# EAGLE board ioboard (EAGLE 4.13)
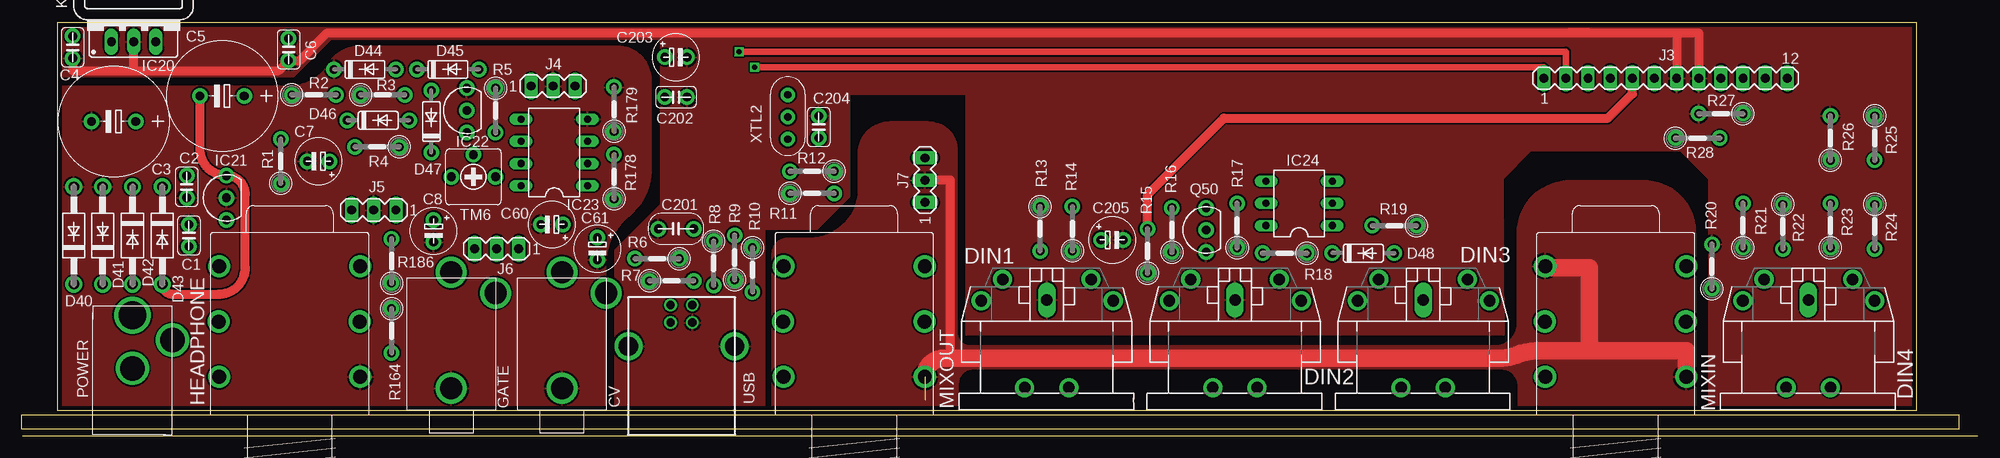
[diagram p0: board, top side]
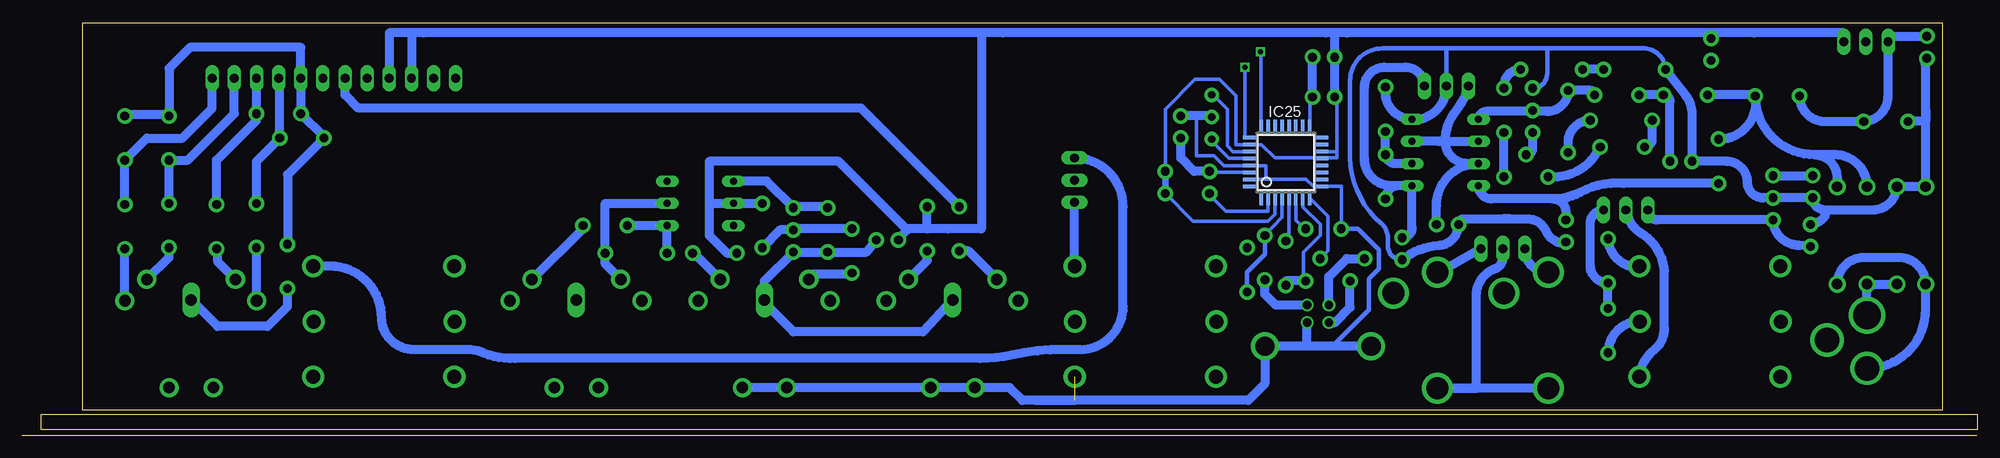
[diagram p1: board, bottom side, seen from below]

Size 224.41 x 47.37 mm. Coordinates in mm from the lower left corner, seen from the top.
Outline: 0.13,0 224.41,0
Outline: 4.06,2.92 217.42,2.92 217.42,47.37 4.06,47.37 4.06,2.92
Outline: 0,2.41 222.25,2.41 222.25,0.76 0,0.76 0,2.41
Copper layers (1*16): Top 0.035mm / dielectric 1.5mm / Bottom 0.035mm
Design rules "default": minimum track width 10mil, minimum drill 24mil, track to track 8mil, track to pad 8mil, pad to pad 8mil, via to via 8mil, smd to smd 8mil, copper to edge 20mil, drill to drill 8mil, minimum pad ring 10mil, minimum via ring 8mil, stop-mask expansion 4mil, vias tented up to drill 0mil, thermal gap 10mil

## Footprints (pad centres in the part's own frame; a part is rotated, then mirrored left to right if it is on the bottom)
C050H075X075 = drill 1 pad 1.778 round: 1 -1.27,0; 2 1.27,0
E5-13 = drill 1 pad 1.778 round: + -2.54,0; - 2.54,0
E5-6 = drill 1 pad 1.778 round: + -1.27,0; - 1.27,0
C050-025X075 = drill 1 pad 1.778 round: 1 -2.032,0; 2 2.032,0
CP-3502 = drill 2.54 round: SLEEVE 5.08,13.462; TIP 0,2.54; TIPSHUNT 0,15.85
DO41-10 = drill 1.2 pad 1.93 round: A 5.588,0; C -5.588,0
DO35-10 = drill 1 pad 1.778 round: A 3.556,0; C -3.556,0
CP-2350 = drill 1.321 pad 2.184 round: 1 7.62,12.58; 3 -7.52,12.58; 4 5.08,15.02; 5 -5.08,15.02; PE -2.54,2.62; PE@ 2.54,2.62 | drill 1.321 long: 2 0,12.68
REAN_1/4STERO = drill 1.6 pad 2.54 round: R 8.05,10.7; RN -8.15,10.7; S 8.1,4.35; SN -8.1,4.35; T 8.1,17.05; TN -8.1,17.05
78XXS = drill 1.016 long: GND 0,-2.54; IN -2.54,-2.54; OUT 2.54,-2.54
2SC536F = drill 1 pad 1.778 round: 1 2.54,0; 2 0,0; 3 -2.54,0
DIL08 = drill 0.813 long: 1 -3.81,-3.81; 2 -1.27,-3.81; 3 1.27,-3.81; 4 3.81,-3.81; 5 3.81,3.81; 6 1.27,3.81; 7 -1.27,3.81; 8 -3.81,3.81
DIL06 = drill 0.813 long: 1 -2.54,-3.81; 2 0,-3.81; 3 2.54,-3.81; 4 2.54,3.81; 5 0,3.81; 6 -2.54,3.81
SQFP-S-7X7-32 = smd 0.4 x 1.6: 1 -2.85,-4.1; 2 -2.05,-4.1; 3 -1.25,-4.1; 4 -0.45,-4.1; 5 0.35,-4.1; 6 1.15,-4.1; 7 1.95,-4.1; 8 2.75,-4.1; 17 2.75,4.1; 18 1.95,4.1; 19 1.15,4.1; 20 0.35,4.1; 21 -0.45,4.1; 22 -1.25,4.1; 23 -2.05,4.1; 24 -2.85,4.1 | smd 1.6 x 0.4: 9 4.1,-2.75; 10 4.1,-1.95; 11 4.1,-1.15; 12 4.1,-0.35; 13 4.1,0.45; 14 4.1,1.25; 15 4.1,2.05; 16 4.1,2.85; 25 -4.1,2.85; 26 -4.1,2.05; 27 -4.1,1.25; 28 -4.1,0.45; 29 -4.1,-0.35; 30 -4.1,-1.15; 31 -4.1,-1.95; 32 -4.1,-2.75
MA12-1 = drill 1.016 long: 1 -13.97,0; 2 -11.43,0; 3 -8.89,0; 4 -6.35,0; 5 -3.81,0; 6 -1.27,0; 7 1.27,0; 8 3.81,0; 9 6.35,0; 10 8.89,0; 11 11.43,0; 12 13.97,0
MA03-1 = drill 1.016 long: 1 -2.54,0; 2 0,0; 3 2.54,0
PJ-102A = drill 2.8 round: P$1 -4.6,-10.862; P$2 0,-7.62 | drill 3.2 round: P$3 0,-13.716
0207/5V = drill 1 pad 1.778 round: 1 -2.54,0; 2 2.54,0
306 = drill 1 pad 1.778 round: 1 -2.54,0; 2 0,-2.54; 3 2.54,0
PN61729 = drill 0.95 round: 1 1.25,14.87; 2 -1.25,14.87; 3 -1.25,12.87; 4 1.25,12.87 | drill 2.2 round: M2 -6.096,10.16; P$2 6.096,10.16
CERM_OSC = drill 0.813 pad 1.676 round: P$1 -2.54,0; P$2 0,0; P$3 2.54,0

## Placement (x,y rotation side)
C1  .1  [C050H075X075]  19.18,22.99 90 top
C2  .1  [C050H075X075]  18.92,28.57 270 top
C3  2200/16  [E5-13]  10.54,36.07 180 top
C4  .1  [C050H075X075]  5.84,44.58 270 top
C5  2200/16  [E5-13]  22.99,38.99 180 top
C6  .1  [C050H075X075]  30.61,44.32 270 top
C7  100/25  [E5-6]  34.04,31.5 180 top
C8  100/25  [E5-6]  47.24,23.5 270 top
C60  10/16  [E5-6]  60.83,24.26 180 top
C61  10/16  [E5-6]  66.04,21.46 270 top
C201  33nF  [C050-025X075]  75.06,23.75 180 top
C202  .1uF  [C050H075X075]  75.06,38.86 0 top
C203  10uF  [E5-6]  75.06,43.43 0 top
C204  .1uF  [C050H075X075]  91.44,35.43 90 top
C205  10uF  [E5-6]  125.09,22.48 0 top
CV  MONO_CC  [CP-3502]  61.98,2.92 0 top
D40  1N4001  [DO41-10]  5.97,22.99 90 top
D41  1N4001  [DO41-10]  9.27,22.99 90 top
D42  1N4001  [DO41-10]  12.7,22.99 270 top
D43  1N4001  [DO41-10]  16.13,22.99 270 top
D44  1N4148  [DO35-10]  39.37,42.04 0 top
D45  1N4148  [DO35-10]  48.9,42.04 0 top
D46  1N4148  [DO35-10]  40.89,36.2 0 top
D47  1N4148  [DO35-10]  46.99,36.07 90 top
D48  1N4148  [DO35-10]  153.92,20.95 0 top
DIN1  CP2350  [CP-2350]  117.6,2.92 0 top
DIN2  CP2350  [CP-2350]  139.19,2.92 0 top
DIN3  CP2350  [CP-2350]  160.78,2.92 0 top
DIN4  CP2350  [CP-2350]  204.98,2.92 0 top
GATE  MONO_CC  [CP-3502]  49.28,2.92 0 top
HEADPHONE  NEUTRIX_STEREO  [REAN_1/4STERO]  30.73,2.41 0 top
IC20  7805  [78XXS]  12.83,47.75 0 top
IC21  78L06Z  [2SC536F]  23.5,27.3 90 top
IC22  LM336Z-5.0  [2SC536F]  51.05,37.34 90 top
IC23  [DIL08]  61.09,32.51 90 top
IC24  4N37  [DIL06]  146.56,26.67 90 top
IC25  FT232  [SQFP-S-7X7-32]  79.38,31.37 0 bottom
J3  [MA12-1]  188.59,41.02 0 top
J4  [MA03-1]  60.96,40.13 0 top
J5  [MA03-1]  40.39,25.91 180 top
J6  [MA03-1]  54.48,21.46 180 top
J7  [MA03-1]  103.63,29.34 90 top
KK1  D03S  [D03S]  12.83,49.02 0 top
MIXIN  NEUTRIX_STEREO  [REAN_1/4STERO]  182.88,2.41 0 top
MIXOUT  NEUTRIX_STEREO  [REAN_1/4STERO]  95.5,2.41 0 top
POWER  2.1MMJACK  [PJ-102A]  12.7,0.13 180 top
Q50  2SC536F  [2SC536F]  135.89,23.62 90 top
R1  100  [0207/5V]  29.72,31.5 90 top
R2  1k  [0207/5V]  33.53,39.12 0 top
R3  6.8k  [0207/5V]  41.4,39.12 0 top
R4  5.6k  [0207/5V]  40.77,33.15 180 top
R5  2.4k  [0207/5V]  54.36,37.34 270 top
R6  27  [0207/5V]  72.9,20.32 180 top
R7  27  [0207/5V]  74.55,17.78 0 top
R8  1.5k  [0207/5V]  79.38,19.81 270 top
R9  4.7k  [0207/5V]  81.79,20.45 90 top
R10  10k  [0207/5V]  83.82,19.05 270 top
R11  10K  [0207/5V]  90.68,27.81 0 top
R12  470  [0207/5V]  90.68,30.35 180 top
R13  220  [0207/5V]  116.84,23.75 270 top
R14  220  [0207/5V]  120.52,23.75 90 top
R15  220  [0207/5V]  129.16,21.21 90 top
R16  100  [0207/5V]  131.95,23.62 90 top
R17  1k  [0207/5V]  139.45,24.13 90 top
R18  220  [0207/5V]  144.91,20.95 180 top
R19  220  [0207/5V]  157.48,24.13 180 top
R20  22  [0207/5V]  193.93,19.43 90 top
R21  2.2K  [0207/5V]  197.48,24.13 90 top
R22  2.2K  [0207/5V]  202.06,24 270 top
R23  2.2K  [0207/5V]  207.52,24.13 90 top
R24  2.2K  [0207/5V]  212.6,24 270 top
R25  100K  [0207/5V]  212.6,34.16 270 top
R26  100K  [0207/5V]  207.52,34.16 90 top
R27  100K  [0207/5V]  194.94,36.96 180 top
R28  100K  [0207/5V]  192.28,34.16 0 top
R164  10  [0207/5V]  42.42,12.06 270 top
R178  2.2k  [0207/5V]  67.94,29.72 90 top
R179  1.8k  [0207/5V]  67.94,37.46 90 top
R186  10  [0207/5V]  42.42,20.07 90 top
TM6  2k  [306]  51.82,29.72 180 top
USB  [PN61729]  75.69,0.13 0 top
XTL2  6.00MHz  [CERM_OSC]  87.88,36.58 90 top

## Library data of the parts
C1-C8 C60 C61 C201-C205 R1-R28 R164 R178 R179 R186 = rcl
CV DIN1-DIN4 GATE HEADPHONE IC21-IC23 MIXIN MIXOUT POWER Q50 TM6 USB = 303parts
D40-D48 = diode
IC20 = v-reg
IC24 = optocoupler
IC25 = usbtoys
J3-J7 = con-lstb
KK1 = heatsink
XTL2 = minimidi

## Nets
+5.333V: C60.+ IC23.3 IC23.6 IC23.7 J4.1
+5V: C6.1 C202.1 C203.+ C205.+ IC20.OUT IC24.5 IC25.3 IC25.13 IC25.14 IC25.26 J3.3 J3.4 R11.2 R12.1 R14.2 R17.2 R18.2
+6V: C1.1 IC21.3 J5.3
+12V: C61.+ IC23.1 J4.3 R178.1
DINSYNC1: J3.12 R24.1 R25.2
DINSYNC2: J3.11 R23.2 R26.1
DINSYNC3: J3.10 R22.1 R27.1
DINSYNC4: J3.9 R21.2 R28.2
GND: C1.2 C2.2 C3.- C4.2 C6.2 C7.- C8.- C60.- C61.- C201.2 C202.2 C203.- C204.2 C205.- CV.TIP D40.A D41.A D44.C DIN1.2 DIN1.PE DIN1.PE@ DIN2.2 DIN2.PE DIN2.PE@ GATE.TIP HEADPHONE.S IC20.GND IC21.2 IC22.1 IC23.4 IC25.9 IC25.17 IC25.29 IC25.31 J3.7 J3.8 J4.2 J5.2 J7.2 MIXIN.S MIXIN.TN MIXOUT.S Q50.3 R10.1 R16.1 R20.2 R25.1 R26.2 R27.2 R28.1 R179.2 USB.4 USB.M2 USB.P$2
HP_OUT: J5.1 R164.1 R186.1
MIDI_IN: J3.5 Q50.2 R15.2 R17.1
MIDI_OUT: J3.6 R13.1
N$1: J7.1 MIXOUT.T
N$2: J7.3 MIXIN.T
N$3: C8.+ IC23.8 R1.1
N$4: D47.A IC22.2 IC23.5 R3.2
N$5: IC23.2 R178.2 R179.1
N$6: C7.+ R2.2 R3.1
N$7: R4.1 TM6.3
N$8: R5.2 TM6.1
N$9: D46.A D47.C
N$10: D46.C R4.2
N$11: D45.A R5.1
N$12: D44.A D45.C
N$13: IC22.3 TM6.2
N$14: R9.1 USB.1
N$15: D41.C D42.A POWER.P$3
N$16: C5.+ D42.C D43.C R1.2 R2.1
N$17: C2.1 C3.+ C4.1 C5.- D40.C D43.A IC20.IN IC21.1 POWER.P$2
N$18: IC24.4 Q50.1 R16.2
N$19: IC25.27
N$20: IC25.28
N$21: IC25.4 R9.2 R10.2
N$22: DIN4.3 R21.1
N$23: DIN4.5 R22.2
N$24: DIN4.1 R24.2
N$25: DIN4.4 R23.1
N$26: GATE.TIPSHUNT J6.3
N$27: CV.TIPSHUNT J6.1
N$28: HEADPHONE.R R164.2
N$29: HEADPHONE.T R186.2
N$78: DIN4.2 R20.1
N$87: D48.A DIN3.5 IC24.2
N$90: D48.C IC24.1 R19.2
N$234: DIN3.4 R19.1
N$293: DIN2.5 R15.1
N$294: DIN2.4 R18.1
N$295: DIN1.5 R13.2
N$296: DIN1.4 R14.1
N$307: R6.2 USB.2
N$309: R7.1 USB.3
N$310: IC25.7 R7.2 R8.2
N$311: IC25.8 R6.1
N$312: IC25.5 R8.1
N$313: C201.1 IC25.6
N$314: C204.1 IC25.30 R12.2
N$315: IC25.2 R11.1
USB_RX: IC25.24 J3.2
USB_TX: IC25.25 J3.1

## Tracks (layer width: path | path; a pad name or v marks a point on that pad's centre or on a via)
+5.333V
  Bottom 1.016: 61.09,33.78 arc-90 58.55,31.24 IC23.7 arc-90 62.1,26.42 C60.+ | 61.09,33.78 arc39 59.82,37.34 arc-25 J4.1 | 61.09,33.78 61.85,33.78 | 61.85,33.78 IC23.3 | 61.85,33.78 IC23.6
+5V
  Bottom 0.381: 74.8,46.23 74.8,46.35 73.41,46.35 | 82.42,24.64 81.66,24.64 | IC25.3 80.62,25.42 81.41,24.64 82.42,24.64 | 75.28,31.88 74.93,31.88 | 75.28,31.88 IC25.13 | 75.28,31.88 80.65,31.88 82.19,33.42 IC25.26 85.09,33.42 85.09,38.99 87,40.89 89.79,40.89 93.22,37.46 R12.1 | C202.1 73.53,38.86 73.53,33.02 | IC25.14 73.53,32.62 73.53,33.02 | 75.28,31.88 73.53,31.88 73.53,33.02 | 82.42,24.64 90.04,24.64 R11.2
  Bottom 0.762: R12.1 R11.2
  Bottom 1.016: IC20.OUT 15.37,46.23 25.65,46.23 | 25.65,46.23 72.26,46.23 | 72.26,46.23 72.39,46.23 | 72.39,46.23 74.8,46.23 111.89,46.23 | 111.89,46.23 114.3,46.23 114.3,23.75 118.11,23.75 | 122.87,23.69 122.81,23.75 118.11,23.75 | 122.87,23.69 C205.+ | R14.2 120.52,23.75 118.11,23.75 | 122.87,23.69 122.81,23.62 | 122.87,23.69 130.68,31.5 145.54,31.5 145.54,26.67 | 145.54,26.67 145.54,22.99 143.51,20.95 R18.2 | 145.54,26.67 IC24.5 R17.2 | 72.39,46.23 74.17,46.23 | C202.1 C203.+ 73.79,46.23 72.26,46.23 | J3.3 179.7,46.23 178.31,46.23 | 111.89,46.23 178.31,46.23 | J3.4 182.25,46.23 178.31,46.23 | C6.1 30.61,46.23 25.65,46.23
+6V
  Bottom 1.016: C1.1 20.45,21.84 arc90 23.5,24.89 IC21.3 36.7,24.77 arc90 J5.3
+12V
  Bottom 1.016: R178.1 arc90 66.42,28.7 IC23.1 | IC23.1 64.9,23.88 arc90 C61.+ | IC23.1 67.31,28.7 arc90 70.36,31.75 70.36,40.01 arc90 68.07,42.29 65.66,42.29 arc90 J4.3
DINSYNC1
  Bottom 1.016: R25.2 212.6,31.88 | R24.1 R25.2 | R25.2 210.06,34.16 205.99,34.16 202.56,37.59 J3.12 202.56,41.15
DINSYNC2
  Bottom 1.016: R23.2 R26.1 205.36,31.62 200.03,36.96 J3.11 200.03,41.15
DINSYNC3
  Bottom 1.016: R22.1 202.06,31.62 197.48,36.2 R27.1 J3.10 197.48,41.27
DINSYNC4
  Bottom 1.016: R28.2 194.69,34.29 | R21.2 197.48,31.5 R28.2 | R28.2 194.82,40.89 J3.9
GND  (1 unrouted)
  Top 1.016: IC20.GND 12.83,41.91 12.7,41.91 | 179.83,46.23 182.25,46.23 | 179.83,46.23 177.42,46.23 | J3.7 189.86,46.23 187.45,46.23 | 179.83,46.23 187.45,46.23 | J3.8 192.41,46.23 187.45,46.23 | 5.84,43.43 C4.2 5.84,41.91 12.7,41.91 | 12.7,41.91 29.46,41.91 C6.2 31.88,43.05 35.05,46.23 179.83,46.23 | 106.68,8.76 106.55,8.89 106.55,29.34 J7.2
  Top 2.032: MIXOUT.S arc-90 105.73,8.89 106.55,8.89 169.42,8.89 arc21 171.45,9.27 arc-23 174.37,9.78 178.82,9.78 | 178.82,9.78 179.83,9.78 179.83,19.3 174.78,19.3 MIXIN.TN | MIXIN.S 190.98,9.78 178.82,9.78
  Bottom 0.381: 82.04,29.42 81.66,29.42 81.66,30.99 83.47,30.99 | 82.04,29.42 IC25.31 | 83.47,30.99 IC25.29 | IC25.17 76.62,38.56 C202.2 | IC25.9 76.24,28.62 77.09,29.46 82.04,29.46 82.04,29.42 | 87.88,36.7 89.66,36.7 89.66,32.13 87.63,32.13 86.49,30.99 83.47,30.99
  Bottom 0.406: IC25.9 73.03,28.62 C201.2
  Bottom 0.508: C61.- arc90 67.69,21.84 67.69,22.73 arc-50 68.45,24.38 arc54 72.01,32.89 72.01,40.77 arc90 68.33,44.45 63.63,44.45 | D44.C 35.81,41.91 arc-90 38.35,44.45 49.4,44.45 | 49.4,44.45 63.63,44.45 | J4.2 60.96,44.45 63.63,44.45 | IC22.1 arc-90 49.4,41.53 49.4,44.45 | 69.85,16.64 69.85,18.03 68.71,19.18 68.71,21.34 71.12,23.75 C201.2 73.15,23.88 | 69.85,16.64 69.85,15.62 | 76.96,12.95 76.94,12.97 USB.4 | 69.85,16.64 69.85,14.48 74.04,10.29 75.44,10.29
  Bottom 1.016: 5.97,37.46 D40.A D41.A 9.27,28.7 arc90 12.06,25.91 17.4,25.91 | 5.97,37.46 5.97,42.55 arc90 C4.2 | C3.- 5.97,36.07 5.97,37.46 | C2.2 arc-90 18.8,27.18 arc-90 C2.2 | C2.2 IC21.2 24.64,27.3 arc90 26.42,29.08 arc-90 28.83,31.5 | C2.2 arc-90 17.53,25.91 17.4,25.91 | C1.2 18.92,24.38 arc-90 17.4,25.91 | 56.01,24.89 53.59,24.89 | 53.59,24.89 51.69,24.89 arc66 49.53,23.5 arc-69 47.24,22.1 C8.- | 56.01,24.89 58.93,24.89 arc-90 C60.- arc87 61.85,21.84 arc-37 C61.- | 54.48,20.45 arc70 55.37,19.18 arc-69 57.53,16.13 57.53,5.46 60.58,5.46 | 56.01,24.89 54.48,24.89 53.59,24.89 | J5.2 40.13,25.15 arc-40 38.61,23.24 arc54 35.94,18.92 35.94,12.32 arc51 37.08,9.91 arc-43 38.86,6.73 | C205.- 127.51,21.08 R16.1 Q50.3 139.19,17.78 139.19,15.37 | C202.2 C203.- | R179.2 67.94,39.37 arc-90 IC23.4 64.9,36.2 arc-90 J4.2 | 87.88,36.7 C204.2 | D44.C 33.53,39.12 arc43 32.77,36.58 C7.- 28.83,31.5 | 193.93,21.84 R20.2 193.93,29.97 R28.1 189.74,34.29 R27.2 J3.8 192.41,44.58 205.1,44.58 207.52,42.16 R26.2 207.64,36.83 212.47,36.83 | 212.47,36.83 212.6,36.83 | GATE.TIP 60.58,5.46 | 60.58,5.46 CV.TIP | 28.83,31.5 28.7,31.5 | 38.86,6.73 38.86,6.48 | HEADPHONE.S arc-90 38.86,6.73 | DIN1.2 121.01,11.94 135.89,11.94 139.32,15.37 139.19,15.37 | DIN2.PE 136.53,5.54 136.53,5.59 | DIN2.PE DIN2.PE@ | 120.01,5.54 DIN1.PE@ | 120.01,5.54 DIN2.PE | 120.01,5.54 120.01,5.71 | DIN1.PE 114.94,5.54 114.94,5.71 | DIN1.PE 120.01,5.54 | DIN1.PE 111.08,5.54 109.6,4.06 108.08,4.06 | 108.08,4.06 83.69,4.06 81.79,5.97 USB.P$2 76.96,10.29 | USB.M2 75.44,10.29 76.96,10.29 | 76.96,10.29 76.96,12.95 | 212.47,36.83 212.47,36.96 212.6,36.96 R25.1 | 139.19,15.37 DIN2.2
  Bottom 1.016: 108.08,4.06 103.6,4.06
  pour Top: 86.11,2.92 86.11,20.95 arc-90 87.88,22.73 90.42,22.73 arc90 96.01,28.32 96.01,32.51 arc-90 99.57,36.07 104.01,36.07 arc-90 107.31,32.77 107.31,11.81 arc90 108.71,10.41 169.16,10.41 arc90 171.58,12.83 171.58,23.24 arc-90 177.67,29.34 186.06,29.34 arc-90 192.02,23.37 192.02,2.92 171.7,2.92 171.7,5.71 arc90 169.8,7.62 109.09,7.62 arc90 107.44,5.97 107.44,2.92
  pour Top: 4.06,2.92 67.06,2.92 67.06,19.68 arc-51 69.72,25.27 arc49 72.26,30.35 72.26,40.77 arc90 68.33,44.7 38.73,44.7 arc59 35.18,42.67 arc-58 30.86,40.13 4.06,40.13
  pour Top: 4.06,47.37 217.42,47.37 217.42,2.92 193.55,2.92 193.55,29.46 190.37,32.64 173.1,32.64 169.93,29.46 170.05,11.56 108.33,11.56 108.33,39.12 95,39.12 95,27.43 91.19,23.62 85.22,23.62 85.22,2.92 68.07,2.92 68.07,21.34 73.28,26.54 73.28,45.47 35.43,45.47 31.11,41.15 4.06,41.15
HP_OUT
  Bottom 1.016: R164.1 R186.1 arc90 44.45,19.56 44.45,24.38 arc90 J5.1
MIDI_IN
  Top 1.016: J3.5 184.78,39.24 181.99,36.45 137.92,36.45 129.16,27.69 R15.2
  Bottom 1.016: Q50.2 135.89,23.75 | Q50.2 135.76,23.75 R15.2 | Q50.2 137.41,23.62 R17.1
MIDI_OUT
  Bottom 1.016: R13.1 128.14,37.59 185.8,37.59 187.32,39.12 J3.6
N$1
  Bottom 1.016: 103.63,19.3 103.6,19.33 | 103.63,19.3 J7.1 | MIXOUT.T 103.6,19.3 103.63,19.3
N$2
  Bottom 1.016: J7.3 arc90 98.04,26.29 98.04,14.86 arc90 103,9.91 104.9,9.91 | 104.9,9.91 106.17,9.91 | MIXIN.T 189.01,19.46 arc90 183.13,13.59 arc-90 179.45,9.91 173.35,9.91 arc23 171.45,9.53 arc-26 167.77,8.89 114.43,8.89 arc-12 110.87,9.27 arc12 104.9,9.91
N$3
  Bottom 1.016: IC23.8 arc-90 55.75,27.18 48.77,27.18 | 48.77,27.18 48.64,27.18 arc-28 45.59,27.94 arc33 40.64,28.96 29.84,28.96 arc-90 29.72,29.08 R1.1 | C8.+ 47.24,25.65 arc-90 48.77,27.18
N$4
  Bottom 1.016: R3.2 arc-90 44.45,39.62 D47.A arc90 49.4,37.21 51.31,37.21 | IC23.5 arc90 56.39,37.21 51.31,37.21 | 51.31,37.21 51.05,37.21 IC22.2 arc90 51.18,37.21 51.31,37.21
N$5
  Bottom 1.016: IC23.2 66.8,31.24 arc90 67.94,32.38 R178.2 R179.1
N$6
  Bottom 1.016: R2.2 35.94,39.12 | R2.2 R3.1 | R2.2 arc90 35.31,38.35 C7.+
N$7
  Bottom 1.016: R4.1 43.69,32.51 arc65 TM6.3
N$8
  Bottom 1.016: 54.36,34.92 R5.2 TM6.1
N$9
  Bottom 1.016: D47.C 46.99,33.66 arc90 D46.A
N$10
  Bottom 1.016: D46.C 37.34,34.04 arc90 R4.2
N$11
  Bottom 1.016: R5.1 54.36,40.13 arc90 D45.A
N$12
  Bottom 1.016: 42.8,42.04 D44.A D45.C
N$13
  Bottom 1.016: 51.05,34.92 IC22.3 51.05,33.02 arc90 TM6.2
N$14
  Bottom 1.016: USB.1 80.53,15 81.79,16.26 R9.1
N$15
  Bottom 1.016: POWER.P$3 D42.A D41.C
N$16
  Bottom 1.016: D42.C arc-90 16.38,32.26 18.67,32.26 | 18.67,32.26 arc90 C5.+ | 18.67,32.26 18.8,32.26 arc90 16.13,29.59 D43.C | C5.+ arc-90 25.53,39.12 R2.1 | R1.2 29.08,34.04 arc-90 C5.+
N$17
  Top 1.016: D43.A arc90 17.27,16.26 22.61,16.26 arc90 25.65,19.3 25.65,27.69 arc90 IC21.1 arc-90 20.45,32.89 C5.-
  Bottom 1.016: D40.C 5.97,17.53 | POWER.P$2 arc-90 5.97,14.48 D40.C | D40.C arc-90 9.02,20.45 13.08,20.45 arc-90 D43.A | IC20.IN 10.29,45.09 | C4.1 10.29,45.85 IC20.IN | IC20.IN 10.29,38.99 arc90 13.21,36.07 C3.+ 17.53,36.07 arc90 C5.- | IC21.1 C2.1
N$18
  Bottom 1.016: R16.2 131.83,26.29 135.76,26.29 Q50.1 138.94,29.21 IC24.4
N$19
  Bottom 0.381: IC25.27 85.45,32.62 86.11,33.27 86.11,37.46 87.88,39.24
N$20
  Bottom 0.381: 88.01,34.16 87.88,34.16 87.88,33.78 85.92,31.82 IC25.28
N$21
  Bottom 0.381: IC25.4 79.82,25.08 R9.2
  Bottom 0.508: R9.2 81.79,20.83 83.82,18.8 R10.2
N$22
  Bottom 1.016: 197.48,21.84 R21.1 197.48,15.53 DIN4.3
N$23
  Bottom 1.016: R22.2 201.93,21.59 201.93,19.97 DIN4.5
N$24
  Bottom 1.016: DIN4.1 R24.2
N$25
  Bottom 1.016: 207.52,21.72 R23.1 207.52,20.48 DIN4.4
N$26
  Bottom 1.016: GATE.TIPSHUNT 49.38,18.77 arc90 49.4,18.8 arc90 51.94,21.34 J6.3
N$27
  Bottom 1.016: CV.TIPSHUNT 62.1,18.54 J6.1
N$28
  Bottom 1.016: HEADPHONE.R 38.83,13.11 arc-90 R164.2
N$29
  Bottom 1.016: 38.61,19.3 38.67,19.3 arc90 HEADPHONE.T | 38.61,19.3 arc90 R186.2 | 38.61,19.3 38.35,19.3
N$78
  Bottom 1.016: DIN4.2 201.95,12.57 196.22,12.57 193.93,14.86 R20.1
N$87
  Bottom 1.016: IC24.2 157.48,26.67 D48.A 157.48,19.72 DIN3.5
N$90
  Bottom 1.016: D48.C IC24.1 R19.2
N$234
  Bottom 1.016: DIN3.4 160.02,23.78 R19.1
N$293
  Bottom 1.016: R15.1 129.03,18.54 133.51,18.54 DIN2.5
N$294
  Bottom 1.016: DIN2.4 147.29,20.95 R18.1
N$295
  Bottom 1.016: 116.97,21.21 R13.2 115.79,21.21 DIN1.5
N$296
  Bottom 1.016: 120.52,21.34 R14.1 120.52,20.1 DIN1.4
N$307
  Bottom 0.381: R6.2 70.23,20.32
  Bottom 1.016: USB.2 74.44,18.27 72.39,20.32 R6.2
N$309
  Bottom 1.016: USB.3 73.74,13 72.01,14.73 R7.1
N$310
  Bottom 0.381: IC25.7 77.43,26.24 75.44,24.26 75.44,22.99 77.34,21.08 77.34,17.91 77.22,17.78
  Bottom 1.016: R8.2 79.38,17.78 77.22,17.78 R7.2
N$311
  Bottom 0.381: IC25.8 74.55,25.19 74.55,21.21 R6.1
N$312
  Bottom 0.381: 79.03,23.21 IC25.5
  Bottom 0.406: 79.03,23.21 79.03,22.7 R8.1
N$313
  Bottom 0.381: C201.1 77.09,23.62 78.22,24.76 IC25.6
N$314
  Bottom 0.381: IC25.30 88.14,30.22 R12.2
  Bottom 1.016: R12.2 89.92,30.35 91.44,31.88 C204.1
N$315
  Bottom 0.381: IC25.2 81.43,25.78 86.23,25.78 88.14,27.69 R11.1
USB_RX  (via drill 0.6)
  Top 0.762: v82.3,44.07 177.16,44.07 J3.2
  Bottom 0.381: IC25.24 82.22,44.07 v82.3,44.07
USB_TX  (via drill 0.6)
  Top 0.762: v84.07,42.29 174.62,42.29 J3.1
  Bottom 0.381: IC25.25 84.07,34.22 v84.07,42.29